# EAGLE board SparkFun_MPU-9250_Breakout (EAGLE 7.6.0)
DESIGNER: Brent Wilkins; VERSION: v11
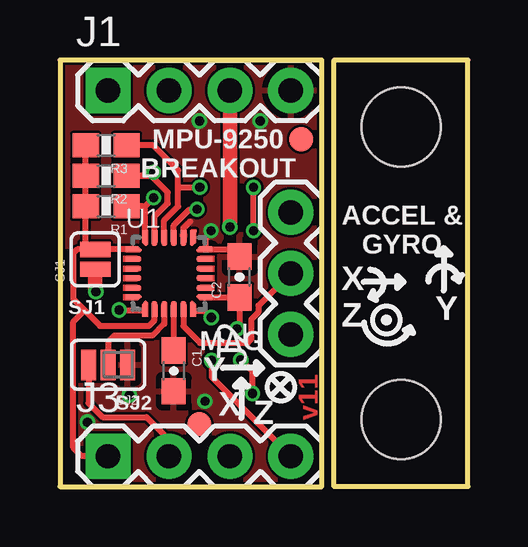
[diagram p0: board, top side]
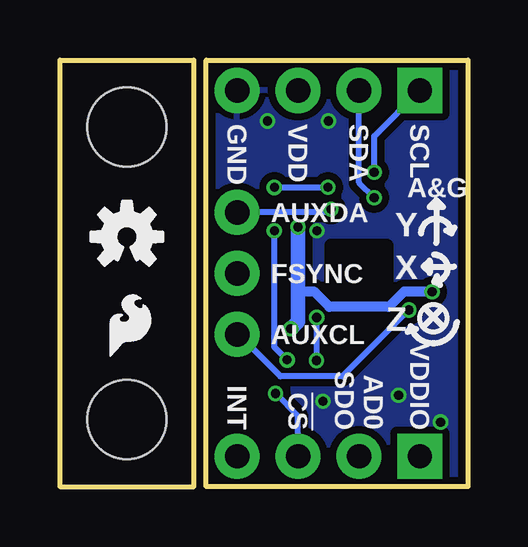
[diagram p1: board, bottom side, seen from below]

Size 17.02 x 17.78 mm. Coordinates in mm from the lower left corner, seen from the top.
Outline: 0,0 10.92,0 10.92,17.78 0,17.78 0,0
Outline: 11.43,0 11.43,17.78 17.02,17.78 17.02,0 11.43,0
Copper layers (1*16): Top 0.035mm / dielectric 1.5mm / Bottom 0.035mm
Design rules "SparkFun-2-layer-FAB-LIMIT": minimum track width 4mil, minimum drill 6mil, track to track 4mil, track to pad 4mil, pad to pad 4mil, via to via 4mil, smd to smd 4mil, copper to edge 4mil, drill to drill 4mil, minimum pad ring 5mil, minimum via ring 5mil, stop-mask expansion 4mil, vias tented up to drill 20mil, thermal gap 10mil

## Footprints (pad centres in the part's own frame; a part is rotated, then mirrored left to right if it is on the bottom)
0603-CAP = smd 1.1 x 1: 1 -0.85,0; 2 0.85,0
FIDUCIAL-1X2 = smd 1 x 1: 1 0,0
1X04 = drill 1.016 pad 1.88 square: 1 0,0 | drill 1.016 pad 1.88: 2 2.54,0; 3 5.08,0; 4 7.62,0
1X03 = drill 1.016 pad 1.88: 1 0,0; 2 2.54,0; 3 5.08,0
0603-RES = smd 1.1 x 1: 1 -0.85,0; 2 0.85,0
PAD-JUMPER-2-NC_BY_PASTE_YES_SILK_FULL_BOX = smd 0.635 x 1.27: 1 -0.412,0; 2 0.412,0
PAD-HUMPER-3-1&2_NC_BY_PASTE_YES_SILK_FULL_BOX = smd 0.635 x 1.27: 1 -0.813,0; 2 0,0; 3 0.813,0
STAND-OFF = hole 3.302: 0,0
QFN24 = smd 0.5 x 0.25: 1 -1.55,1; 2 -1.55,0.6; 3 -1.55,0.2; 4 -1.55,-0.2; 5 -1.55,-0.6; 6 -1.55,-1; 13 1.55,-1; 14 1.55,-0.6; 15 1.55,-0.2; 16 1.55,0.2; 17 1.55,0.6; 18 1.55,1 | smd 0.08 x 0.13: 1$1 -1.32,1.06; 1$3 -1.26,0.94; P$33 1.26,-0.94; P$34 1.32,-1.06; P$58 1.26,0.94; P$59 1.32,1.06; P$68 -1.26,-0.94; P$69 -1.32,-1.06 | smd 0.1 x 0.185 rotated 45: 1$2 -1.25,1.024; P$49 1.024,-1.25 | smd 0.14 x 0.14: 1$4 -1.22,0.945; P$23 -0.945,-1.22; P$24 1.22,-0.945; P$36 0.945,1.22; P$51 0.945,-1.22; P$56 1.22,0.945; P$61 -0.945,1.22; P$66 -1.22,-0.945 | smd 0.05 x 0.05: 1$5 -1.175,0.97; P$25 -0.97,-1.175; P$31 1.175,-0.97; P$37 0.97,1.175; P$52 0.97,-1.175; P$57 1.175,0.97; P$62 -0.97,1.175; P$67 -1.175,-0.97 | smd 0.25 x 0.5: 7 -1,-1.55; 8 -0.6,-1.55; 9 -0.2,-1.55; 10 0.2,-1.55; 11 0.6,-1.55; 12 1,-1.55; 19 1,1.55; 20 0.6,1.55; 21 0.2,1.55; 22 -0.2,1.55; 23 -0.6,1.55; 24 -1,1.55 | smd 0.25 x 0.3: P$1 -0.2,1.3; P$3 0.2,1.3; P$5 0.6,1.3; P$11 -0.6,1.3; P$16 0.2,-1.3; P$18 -0.2,-1.3; P$20 -0.6,-1.3; P$26 0.6,-1.3 | smd 0.3 x 0.25: P$2 -1.3,0.2; P$4 -1.3,0.6; P$28 -1.3,-0.2; P$38 -1.3,-0.6; P$40 1.3,0.2; P$42 1.3,-0.2; P$44 1.3,-0.6; P$50 1.3,0.6 | smd 0.1 x 0.185 rotated 225: P$7 1.25,-1.024; P$60 -1.024,1.25 | smd 0.1 x 0.185 rotated 135: P$22 -1.024,-1.25; P$55 1.25,1.024 | smd 0.13 x 0.08: P$27 -0.94,-1.26; P$29 -1.06,-1.32; P$39 0.94,1.26; P$41 1.06,1.32; P$53 0.94,-1.26; P$54 1.06,-1.32; P$63 -0.94,1.26; P$64 -1.06,1.32 | smd 0.1 x 0.185 rotated 315: P$35 1.024,1.25; P$65 -1.25,-1.024

## Placement (x,y rotation side)
C1  0.1uF  [0603-CAP]  4.75,4.83 270 top
C2  0.1uF  [0603-CAP]  7.49,8.74 90 top
FID1  FIDUCIAL1X2  [FIDUCIAL-1X2]  10.06,14.48 0 top
FID2  FIDUCIAL1X2  [FIDUCIAL-1X2]  5.82,2.62 0 top
FRAME1  FRAME-LETTER  [CREATIVE_COMMONS]  -21.87,-13.41 0 top  (outside the outline)
J1  [1X04]  2.01,16.51 0 top
J2  [1X03]  9.63,6.35 90 top
J3  [1X04]  2.01,1.27 0 top
LOGO1  SFE_LOGO_FLAME.1_INCH  [SFE_LOGO_FLAME_.1]  15.24,5.08 0 bottom
LOGO2  OSHW-LOGOS  [OSHW-LOGO-S]  14.22,10.41 0 bottom
R1  10K  [0603-RES]  1.93,11.68 180 top
R2  10K  [0603-RES]  1.93,12.95 180 top
R3  10K  [0603-RES]  1.93,14.22 180 top
SJ1  JUMPER-PAD-2-NC_BY_PASTEFULL-BOX-SILK  [PAD-JUMPER-2-NC_BY_PASTE_YES_SILK_FULL_BOX]  1.47,9.47 90 top
SJ2  JUMPER_PAD-3-1&2_NC_BY_PASTE  [PAD-HUMPER-3-1&2_NC_BY_PASTE_YES_SILK_FULL_BOX]  2.01,5.08 180 top
STANDOFF1  STAND-OFF  [STAND-OFF]  14.22,2.79 0 top
STANDOFF2  STAND-OFF  [STAND-OFF]  14.22,14.99 0 top
U1  MPU-9250  [QFN24]  4.55,8.89 0 top

## Library data of the parts
C1 C2 = SparkFun-Capacitors; PROD_ID: CAP-00810
FID1 FID2 FRAME1 LOGO1 LOGO2 = SparkFun-Aesthetics
J1 J3 = SparkFun-Connectors; PROD_ID: CONN-09696
J2 = SparkFun-Connectors
R1-R3 = SparkFun-Resistors; PROD_ID: RES-00824
SJ1 SJ2 = SparkFun-Passives
STANDOFF1 STANDOFF2 = SparkFun-Electromechanical
U1 = Testing; PROD_ID: IC-13192

## Nets
!CS: J3.3 R3.1 U1.22
AD0/SDO: J3.2 SJ2.3
ADSD_STUB: SJ2.2 U1.9
AUX_CL: J2.1 U1.7
AUX_DA: J2.3 U1.21
FSYNC: J2.2 U1.11
GND: C1.2 C2.2 J1.4 SJ2.1 U1.18 U1.20
INT: J3.4 U1.12
REGOUT: C1.1 U1.10
SCL/SCLK: J1.1 R2.1 U1.23
SDA/SDI: J1.2 R1.1 U1.24
VDD: C2.1 J1.3 SJ1.1 U1.13
VDDIO: J3.1 R1.2 R2.2 R3.2 SJ1.2 U1.1 U1.8

## Tracks (layer width: path | path; a pad name or v marks a point on that pad's centre or on a via)
!CS  (via drill 0.38)
  Top 0.254: R3.1 3.89,14.22 4.93,13.18 4.93,12.48 | U1.22 4.35,11.1 4.93,11.68 4.93,12.48 | 4.93,12.48 v5.84,12.48 | v8.03,3.89 8.03,4.8 v7.54,5.28 | v8.08,10.67 v8.08,12.47
  Bottom 0.254: J3.3 7.09,2.95 v8.03,3.89 | v7.54,5.28 8.08,5.82 v8.08,10.67 | v8.08,12.47 v8.07,12.48 v5.84,12.48
AD0/SDO
  Top 0.254: SJ2.3 1.19,3.48 1.78,2.9 3.61,2.9 4.55,1.96 J3.2
ADSD_STUB
  Top 0.254: U1.9 4.35,6.79 3.86,6.3 2.26,6.3 2.01,6.04 SJ2.2
AUX_CL  (via drill 0.38)
  Top 0.254: U1.7 2.49,7.34 v2.46,7.37
  Bottom 0.254: v2.46,7.37 5.23,4.6 7.82,4.6 9.58,6.35 J2.1
AUX_DA  (via drill 0.38)
  Top 0.254: U1.21 4.75,10.89 5.41,11.56 v5.71,11.56
  Bottom 0.254: v5.71,11.56 5.84,11.43 J2.3
FSYNC
  Top 0.254: U1.11 5.15,6.69 5.84,5.99 7.82,5.99 7.98,6.15 7.98,6.96 8.28,7.26 8.28,7.54 J2.2
GND  (via drill 0.38)
  Top 0.178: U1.20 5.15,10.76
  Top 0.254: 6.1,10.31 U1.18 7.49,9.89 C2.2 | 5.15,10.76 5.44,11.05
  other vias: 6.05,3.56 2.9,3.81 6.3,10.67 1.14,2.69 8.36,15.24 5.82,15.24
  pour Top: -0.03,17.81 10.9,17.78 10.9,0 0,0
  pour Bottom (isolate 0.305): 0,0 10.92,0 10.92,17.78 0,17.78
INT  (via drill 0.38)
  Top 0.254: U1.12 6.02,7.34 v6.31,7.05 | v6.33,5.26 6.33,4.57 J3.4
  Bottom 0.254: v6.31,7.05 v6.31,5.27 v6.33,5.26
REGOUT
  Top 0.254: U1.10 C1.1
SCL/SCLK  (via drill 0.38)
  Top 0.254: U1.23 3.95,11.26 4.5,11.81 4.5,12.27 3.81,12.95 R2.1 3.76,12.95 v3.91,13.11
  Bottom 0.254: v3.91,13.11 3.91,14.61 J1.1
SDA/SDI  (via drill 0.38)
  Top 0.254: U1.24 3.55,11.59 3.45,11.68 | 3.45,11.68 R1.1 | 3.45,11.68 3.56,11.68 v3.91,12.04
  Bottom 0.254: v3.91,12.04 4.55,12.68 J1.2
VDD  (via drill 0.38)
  Top 0.254: U1.13 C2.1 7.49,6.68 v7.39,6.58
  Top 0.61: J1.3 v7.09,10.82 | SJ1.1 1.47,8.15 v1.5,8.13
  Bottom 0.406: v1.5,8.13 2.67,8.13 3.3,7.49 5.78,7.49 6.43,8.14 7.09,8.14
  Bottom 0.61: v7.09,10.82 7.09,8.14 7.09,6.88 v7.39,6.58
VDDIO
  Top 0.254: SJ1.2 U1.1 0.72,9.89 0.56,9.73 0.56,7.82 1.03,7.35 | SJ1.2 | SJ1.2 1.08,9.89 R1.2 R2.2 R3.2 | 1.03,7.35 1.68,6.71 3.71,6.71 3.95,6.94 U1.8 | J3.1 0.91,1.27 0.56,1.63 0.56,6.88 1.03,7.35
(copper drawn outside any net)
  shapes: Top area x10

## Text on the board
tPlace: MPU-9250 / BREAKOUT | ACCEL & / GYRO | SJ1 | X | Z | Y | MAG | SJ2 | Y | X | Z
bPlace: SCL | SDA | VDD | GND | A&G | AUXDA | Y | X | FSYNC | Z | AUXCL | VDDIO | AD0 / SDO | !CS | INT
Measures: All units in inch
tDocu: V-score for the end user if they want to / remove more than 1/3 of the board size | Don't cut v-score in production!